# Altium PCB P2_2478.PcbDoc
Units mil, origin at the board's own origin, x right, y up, seen from the top; angles counter-clockwise.
Board outline 6000 x 4000 mil, 2 copper layers (Top Layer, Bottom Layer); 27 components, 35 nets, 115 pads, 4 vias.
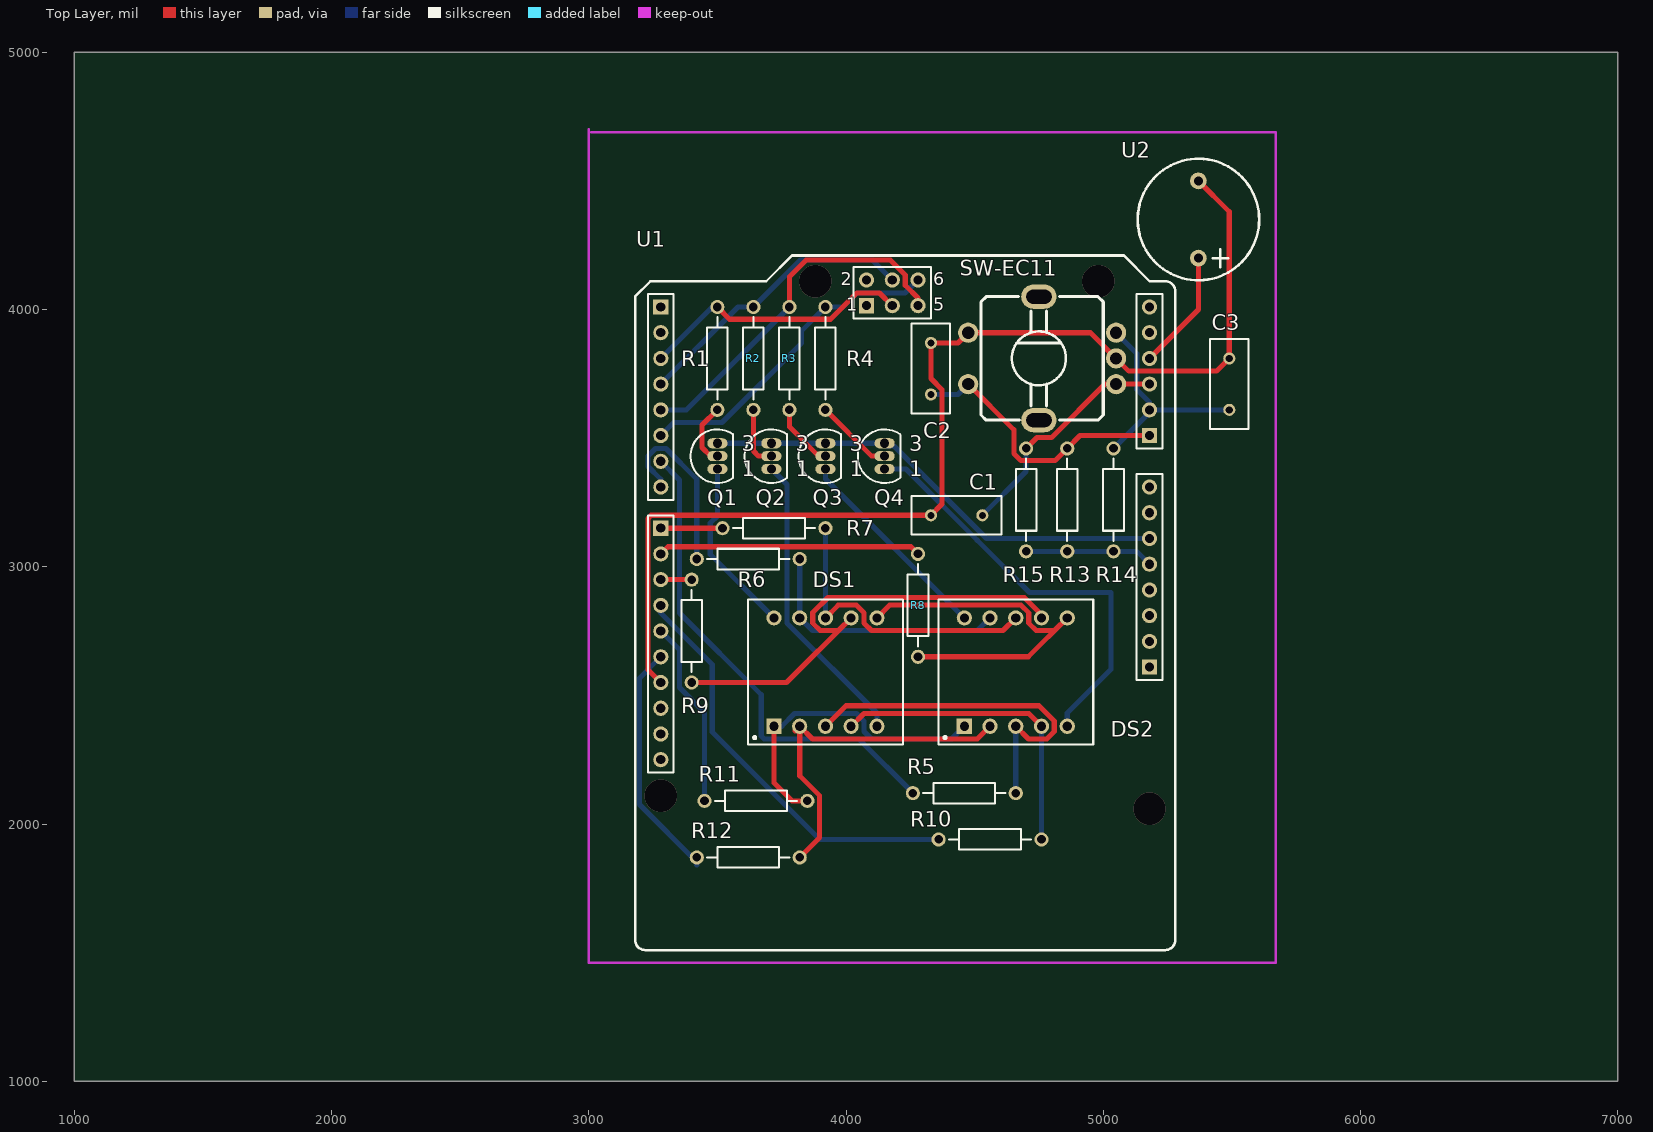
[diagram p0: Top Layer view]
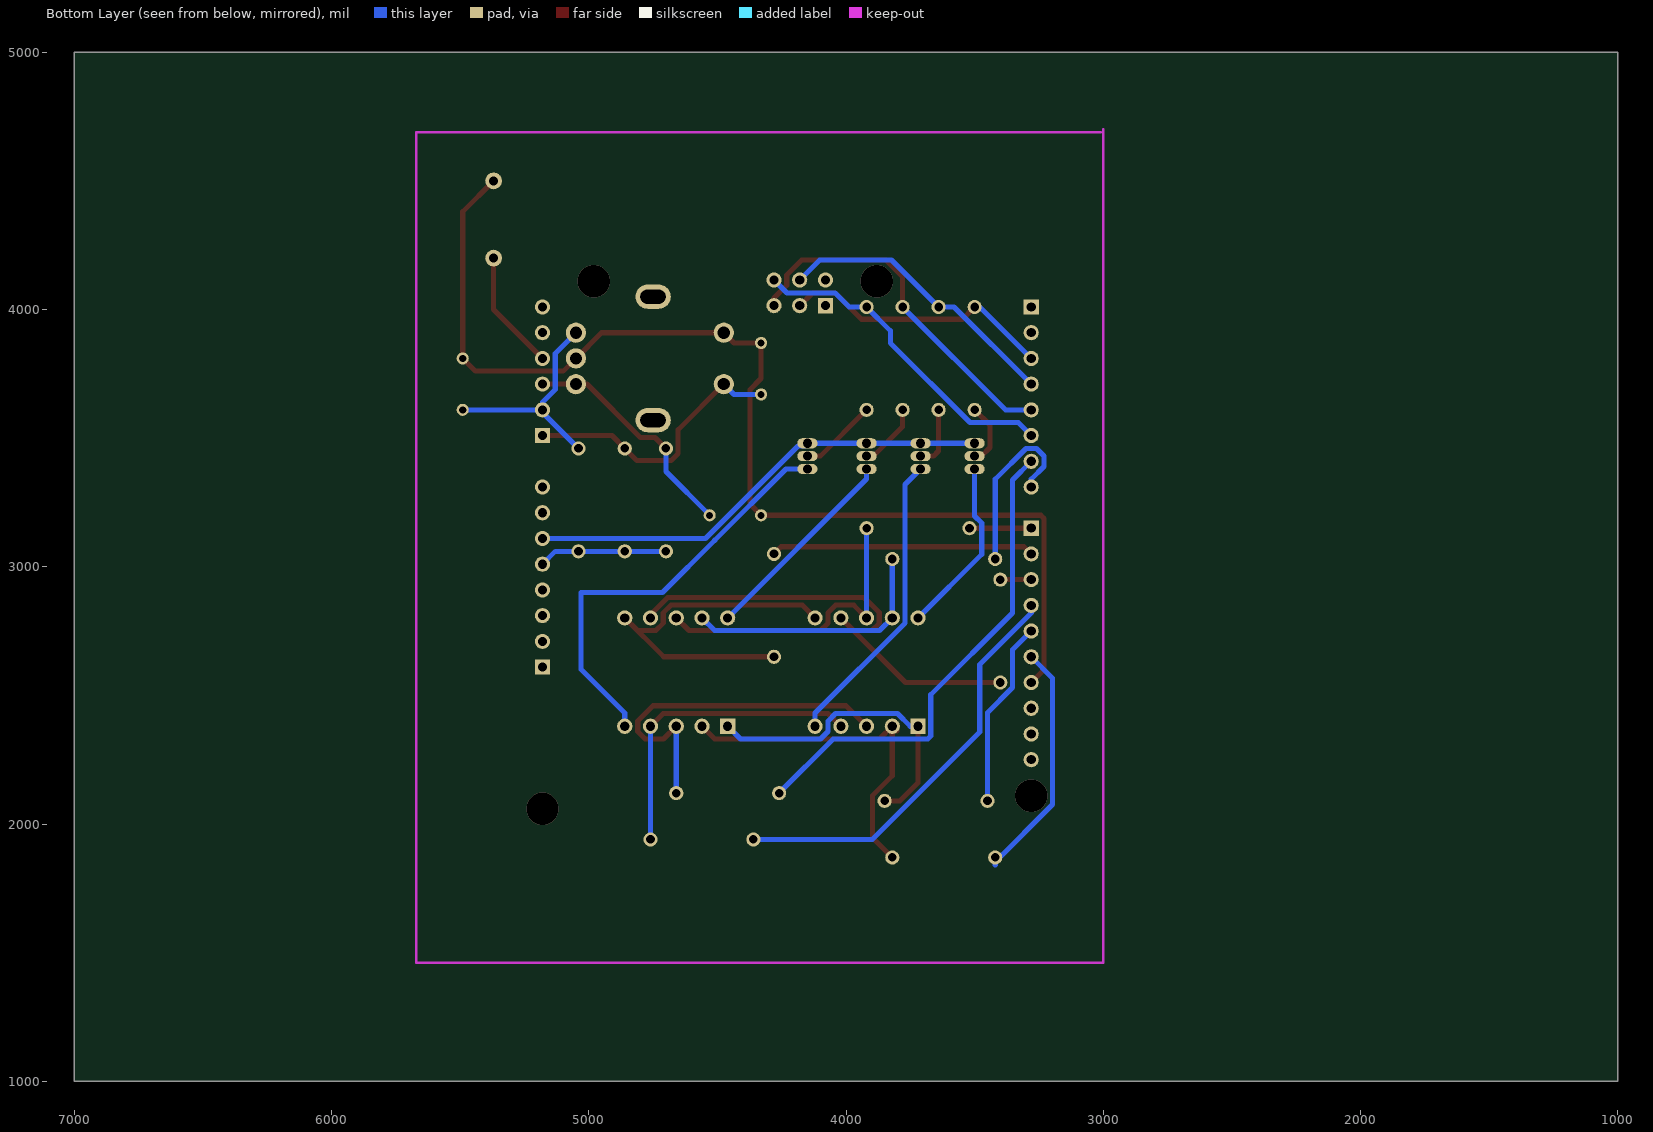
[diagram p1: Bottom Layer view, seen from below]

## Layer stack, top to bottom
Top Layer: signal copper 1.4
Dielectric: dielectric 12.6, FR-4, Dk 4.8
Bottom Layer: signal copper 1.4

## Board outline
1000,1000 7000,1000 7000,5000 1000,5000

## Design rules (kind name [scope] priority, off if disabled: settings)
Clearance [All] p1: gap=10
PolygonConnect [All] p1: connectstyle=Relief reliefconductorwidth=10 reliefentries=4 polygonreliefangle="90 Angle"
RoomDefinition P2_2478 [InComponentClass('P2_2478')] p1: confinementstyle=ConfineIn formatcopy=TRUE lockcomponents=FALSE outline 8000,880 17250,880 17250,3710 8000,3710
RoutingVias [All] p1: holewidth=28 width=50 viastyle="Through Hole" minholewidth=28 minwidth=50 maxholewidth=28 maxwidth=50
SilkscreenOverComponentPads [All] p1: minsilkscreentomaskgap=10
SolderMaskExpansion [All] p1: expansion=4
TestPointUsage [All] p1: valid=0 allowmultiple=FALSE
Testpoint [All] p1: side=15 testpointundercomponent=TRUE minsize=40 maxsize=100 preferedsize=60 minholesize=0 maxholesize=40 preferedholesize=32 testpointgrid=1 style=1023 order=0123456789
Width [All] p1: maxlimit=50 minlimit=10 preferedwidth=10 toplayer_minwidth=20 toplayer_prefwidth=25 bottomlayer_minwidth=20 bottomlayer_prefwidth=25 minimp=50.000000 maximp=50.000000 favimp=50.000000
23 further rules are at their usual default settings.

## Components (designator, comment, footprint, x,y, rotation, side; value= is the part's Value field where it differs from the comment)
C1 "Cap" RAD-0.2 4430,3200 r180 top
C2 "Cap" RAD-0.2 4330,3770 r90 top
C3 "Cap" RAD-0.2 5490,3710 r90 top
DS1 "2-DigitDPY" 2-DigitDPY 3720,2380 r0 top
DS2 "2-DigitDPY" 2-DigitDPY 4460,2380 r0 top
Q1 "NPN" TO-226 3500,3430 r0 top
Q2 "NPN" TO-226 3710,3430 r0 top
Q3 "NPN" TO-226 3920,3430 r0 top
Q4 "NPN" TO-226 4150,3430 r0 top
R1 "Res1" AXIAL-0.4 3500,3810 r270 top
R2 "Res1" AXIAL-0.4 3640,3810 r270 top
R3 "Res1" AXIAL-0.4 3780,3810 r270 top
R4 "Res1" AXIAL-0.4 3920,3810 r270 top
R5 "Res1" AXIAL-0.4 4460,2120 r0 top
R6 "Res1" AXIAL-0.4 3620,3030 r0 top
R7 "Res1" AXIAL-0.4 3720,3150 r0 top
R8 "Res1" AXIAL-0.4 4280,2850 r270 top
R9 "Res1" AXIAL-0.4 3400,2750 r270 top
R10 "Res1" AXIAL-0.4 4560,1940 r0 top
R11 "Res1" AXIAL-0.4 3650,2090 r0 top
R12 "Res1" AXIAL-0.4 3620,1870 r0 top
R13 "Res1" AXIAL-0.4 4860,3260 r270 top
R14 "Res1" AXIAL-0.4 5040,3260 r90 top
R15 "Res1" AXIAL-0.4 4700,3260 r90 top
SW-EC11 "SW-EC11" EC11 4750,3810 r90 top
U1 "Arduino" Arduino-UNO 4230,3150 r90 top
U2 "BUZZER" Buzzer 5370,4200 r90 top

## Footprints (in the part's own frame and the unit in brackets; to place one, negate y for a bottom-side part, rotate by r counter-clockwise, add the part's x,y. Pads: shape width x height; smd on the part's side, far side on the other; paste and mask are expansions set on the pad)
2-DigitDPY [mm] "LED, 7-Segment Display, 9.2 mm, Dual Digit; 10 Leads; Row Space 10.7 mm; Pitch 2.54 mm"
  rect 1.5x1.5 hole 0.9: 1(0,0)
  round 1.5 hole 0.9: 2(2.54,0) 3(5.08,0) 4(7.62,0) 5(10.16,0) 6(10.16,10.7) 7(7.62,10.7) 8(5.08,10.7) 9(2.54,10.7) 10(0,10.7)
  silkscreen extent -2.57,-1.8 12.73,12.5
Arduino-UNO [mm] "Arduino板"
  rect 1.5x1.5 hole 0.9: 1(21.844,24.13) 1(21.971,3.81) 9(0,24.13) 19(-13.716,-24.13) 27(9.144,-24.13)
  round 1.5 hole 0.9: 2(19.304,24.13) 2(24.511,3.81) 3(16.764,24.13) 3(21.971,1.27) 4(14.224,24.13) 4(24.511,1.27) 5(11.684,24.13) 5(21.971,-1.27) 6(9.144,24.13) 6(24.511,-1.27) 7(6.604,24.13) 8(4.064,24.13) 10(-2.54,24.13) 11(-5.08,24.13) 12(-7.62,24.13) 13(-10.16,24.13) 14(-12.7,24.13) 15(-15.24,24.13) 16(-17.78,24.13) 17(-20.32,24.13) 18(-22.86,24.13) 20(-11.176,-24.13) 21(-8.636,-24.13) 22(-6.096,-24.13) 23(-3.556,-24.13) 24(-1.016,-24.13) 25(1.524,-24.13) 26(4.064,-24.13) 28(11.684,-24.13) 29(14.224,-24.13) 30(16.764,-24.13) 31(19.304,-24.13) 32(21.844,-24.13)
  silkscreen extent -41.66,-26.67 26.92,26.67
AXIAL-0.4 [mm] "Resistor; 2 Leads"
  round 1.4 hole 0.85: 1(-5.08,0) 2(5.08,0)
  silkscreen extent -4.06,-1.02 4.06,1.02
Buzzer [mil] "蜂鸣器"
  round 65 hole 36: 1(0,0) 2(300,0)
  silkscreen extent -86,-236 386,236
EC11 [mm] "旋转编码器"
  round 2 hole 1.2: 1(-2.54,-7.62) 2(0,-7.62) 3(2.54,-7.62) 4(2.54,6.985) 5(-2.54,6.985)
  oval 2.4x3.5 hole 1.4 slot 2.5 at 90 deg: 6(-6.096,0) 7(6.096,0)
  silkscreen extent -6.1,-6.35 6.1,5.71
RAD-0.2 [mm] "Jumper Wire; 2 Leads"
  round 1.2 hole 0.7: 1(-2.54,0) 2(2.54,0)
  silkscreen extent -4.44,-1.91 4.44,1.91
TO-226 [mm] "TO, Flat Index; 3 In-Line, Axial Leads; Body Dia. 4.8mm; Leads 0.55 x 0.51 mm (max)"
  oval 2x1 hole 0.9: 1(0,-1.27) 2(0,0) 3(0,1.27)
  silkscreen extent -2.65,-2.65 1.55,2.65

## Part data
C1 C2 C3: "Capacitor"
DS1 DS2: "9.2 mm Green 7-Segment Display: 2-Digit, RH DP"
Q1 Q2 Q3 Q4: "NPN Bipolar Transistor"
R1 R2 R3 R4 R5 R6 R7 R8 R9 R10 R11 R12 R13 R14 R15: "Resistor"
SW-EC11: "旋转编码开关"
U1: library part Arduino-UNO
U2: "Buzzer"

## Via types
v1: diameter 125.98, hole 125.98, Top Layer to Bottom Layer, 4 vias

## Nets (pads, with @x,y where several pads share a name; then routed paths per layer and width w, separated by ;. In a path a pad name is that pad's centre, name@x,y a point inside that pad or via, vN(x,y) a via of type N, cw(c..) or ccw(c..) an arc to the next point about the centre after c; other vN are vias at no path point)
A: DS1.3 DS2.3 R5.2 | length 1430
  Top Layer w20: DS1.3 3999.53,2459.53 4750.52,2459.53 4809.53,2400.51 4809.53,2359.49 4780.52,2330.47 4709.53,2330.47 DS2.3
  Bottom Layer w20: R5.2 DS2.3
B: DS1.9 DS2.9 R6.2 | length 1009.8
  Bottom Layer w20: R6.2 DS1.9 3869.53,2751.73 4510.47,2751.73 DS2.9
C: DS1.8 DS2.8 R7.2 | length 1194.3
  Top Layer w20: DS1.8 3969.53,2850.79 4040.51,2850.79 4070.47,2820.83 4070.47,2780.74 4099.48,2751.73 4610.47,2751.73 DS2.8
  Bottom Layer w20: DS1.8 R7.2
D: DS1.6 DS2.6 R8.2 | length 1488.2
  Top Layer w20: DS1.6 4169.53,2850.79 4680.52,2850.79 4710.47,2820.83 4710.47,2780.74 4739.48,2751.73 4810.47,2751.73 DS2.6 4708.74,2650 R8.2
E: DS1.7 DS2.7 R9.2 | length 1901.4
  Top Layer w20: R9.2 3768.74,2550 DS1.7 3970.47,2751.73 3899.49,2751.73 3870.47,2780.74 3870.47,2821.77 3929.49,2880.79 4692.94,2880.79 4760,2813.73 DS2.7
F: DS1.4 DS2.4 R10.2 | length 1221
  Top Layer w20: DS1.4 4069.53,2429.53 4710.47,2429.53 DS2.4
  Bottom Layer w20: R10.2 DS2.4
G: DS1.1 DS2.1 R11.2 | length 1224.5
  Top Layer w20: DS1.1 3720,2160 3790,2090 R11.2
  Bottom Layer w20: DS1.1 3749.96,2380 3799.49,2429.53 4040.51,2429.53 4070.47,2399.57 4070.47,2359.49 4099.48,2330.47 4410.47,2330.47 DS2.1
GND: C1.2 C2.2 C3.2 SW-EC11.2 SW-EC11.4 U1.15 U2.2 | length 4467.8
  Top Layer w20: U1.15 3230.47,2599.53 3230.47,3187.81 3242.66,3200 C1.2 4373.62,3243.62 4373.62,3688.07 4330,3731.69 C2.2 4435,3870 SW-EC11.4 4950,3910 SW-EC11.2 5099.53,3760.47 5440.47,3760.47 C3.2 5490,4380 U2.2
H: DS1.2 DS2.2 R12.2 | length 1380.1
  Top Layer w20: DS1.2@3802.44,2362.44 DS1.2 ; R12.2 3897.56,1947.56 3897.56,2109.7 3820,2187.26 DS1.2 ; DS2.2 4510.47,2330.47 3869.53,2330.47 DS1.2
NetC1_1: C1.1 R15.2 SW-EC11.1 U1.29 | length 914
  Top Layer w20: R15.2 4742.76,3502.76 4799.51,3502.76 5006.75,3710 SW-EC11.1 U1.29
  Bottom Layer w20: C1.1 4700,3370 R15.2
NetC2_1: C2.1 R13.1 SW-EC11.5 U1.27 | length 1084.3
  Top Layer w20: SW-EC11.5 4652.44,3532.56 4652.44,3440.3 4680.3,3412.44 4812.44,3412.44 R13.1 4910,3510 U1.27
  Bottom Layer w20: C2.1 4435,3670 SW-EC11.5
NetC3_1: C3.1 R14.2 SW-EC11.3 U1.28 | length 871.8
  Bottom Layer w20: R14.2 5180,3600 U1.28 ; SW-EC11.3 5130.47,3829.53 5130.47,3689.49 5180,3639.96 U1.28 ; C3.1 U1.28
NetDS1_5: DS1.5 Q2.1 | length 1169.8
  Bottom Layer w20: Q2.1 3770.47,3319.53 3770.47,2780.74 4120,2431.22 DS1.5
NetDS1_10: DS1.10 Q1.1 | length 692.7
  Bottom Layer w20: Q1.1 3500,3197.26 3472.44,3169.7 3472.44,3048.82 DS1.10
NetDS2_5: DS2.5 Q4.1 | length 1669.2
  Bottom Layer w20: Q4.1 4233.38,3380 4510.47,3102.91 4713.38,2900 5030,2900 5030,2601.22 4860,2431.22 DS2.5
NetDS2_10: DS2.10 Q3.1 | length 802.4
  Bottom Layer w20: Q3.1 3920,3341.26 DS2.10
NetQ1_2: Q1.2 R1.2 | length 244.3
  Top Layer w20: Q1.2 3474.19,3430 3440.63,3463.56 3440.63,3550.63 R1.2
NetQ1_3: Q1.3 Q2.3 Q3.3 Q4.3 U1.24 | length 1833.3
  Bottom Layer w20: Q1.3 Q2.3 Q3.3 Q4.3 4160.31,3469.68 4186.12,3469.68 4545.81,3110 U1.24
NetQ2_2: Q2.2 R2.2 | length 238.3
  Top Layer w20: R2.2 3640,3450 3660,3430 Q2.2
NetQ3_2: Q3.2 R3.2 | length 253.1
  Top Layer w20: R3.2 3780,3544.19 3894.19,3430 Q3.2
NetQ4_2: Q4.2 R4.2 | length 304.6
  Top Layer w20: R4.2 4100,3430 Q4.2
NetR1_1: R1.1 U1.3 | length 1065.3
  Top Layer w20: R1.1 3547.56,3962.44 3940.1,3962.44 4042.19,4064.53 4130.47,4064.53 U1.3@4180,4015
  Bottom Layer w20: U1.3@3280,3810 3480,4010 R1.1
NetR2_1: R2.1 U1.4 | length 1132.4
  Bottom Layer w20: U1.4@3280,3710 3580,4010 R2.1 3822.99,4192.99 4102.01,4192.99 U1.4@4180,4115
NetR3_1: R3.1 U1.5 | length 1425
  Top Layer w20: R3.1 3780,4127.37 3845.62,4192.99 4172.05,4192.99 4230.47,4134.57 4230.47,4094.49 4280,4044.96 U1.5@4280,4015
  Bottom Layer w20: U1.5@3280,3610 3380,3610 R3.1
NetR4_1: R4.1 U1.6 | length 1278.3
  Bottom Layer w20: U1.6@3280,3510 3330.47,3560.47 3517.73,3560.47 3827.56,3870.3 3827.56,3917.56 R4.1 3987.66,4010 4042.19,4064.53 4229.53,4064.53 U1.6@4280,4115
NetR5_1: R5.1 U1.7 | length 1911.1
  Bottom Layer w20: U1.7 3352.44,3337.56 3352.44,2820.47 3670.47,2502.44 3670.47,2342.19 3682.19,2330.47 4049.53,2330.47 R5.1
NetR6_1: R6.1 U1.8 | length 702.1
  Bottom Layer w20: U1.8 3280,3339.96 3230.47,3389.49 3230.47,3430.51 3259.49,3459.53 3300.51,3459.53 3420,3340.04 R6.1
NetR7_1: R7.1 U1.9 | length 240
  Top Layer w20: U1.9 R7.1
NetR8_1: R8.1 U1.10 | length 1022.8
  Top Layer w20: U1.10 3307.56,3077.56 4252.44,3077.56 R8.1
NetR9_1: R9.1 U1.11 | length 120
  Top Layer w20: U1.11 R9.1
NetR10_1: R10.1 U1.12 | length 1628.2
  Bottom Layer w20: U1.12 3280,2820.04 3480,2620.04 3480,2357.56 3897.56,1940 R10.1
NetR11_1: R11.1 U1.13 | length 730.4
  Bottom Layer w20: U1.13 3352.44,2677.56 3352.44,2530.3 3450,2432.74 R11.1
NetR12_1: R12.1 U1.14 | length 936.7
  Bottom Layer w20: U1.14 3197.01,2567.01 3197.01,2075.62 3420,1852.63 3420,1840
NetR13_2: R13.2 R14.1 R15.1 U1.23 | length 500.7
  Bottom Layer w20: R15.1 R13.2 R14.1 5130,3060 U1.23
NetU1_30: U1.30 U2.1 | length 468.7
  Top Layer w20: U1.30 5370,4000 U2.1
pads on no net: SW-EC11.6 SW-EC11.7 U1.1 U1.2 U1.16 U1.17 U1.18 U1.19 U1.20 U1.21 U1.22 U1.25 U1.26 U1.31 U1.32
copper on no net:
  other v1: 5180,2060 3280,2110 3880,4110 4980,4110

## Keep-outs
Keep-Out Layer:
  lines w10: 3000,4700 3000,4680 3000,4660 3000,1460 5670,1460 5670,4690 3030,4690 3010,4690
  text "M67_14_2478_B" at 3840,1620 h60

## Text inside footprints (layer, text, board x,y; h text height)
Q1: Top Overlay "3" at 3595.32,3448.39 h59.05; Top Overlay "1" at 3595.32,3352.09 h59.05
Q2: Top Overlay "3" at 3805.32,3448.39 h59.05; Top Overlay "1" at 3805.32,3352.09 h59.05
Q3: Top Overlay "3" at 4015.32,3448.39 h59.05; Top Overlay "1" at 4015.32,3352.09 h59.05
Q4: Top Overlay "3" at 4245.31,3448.39 h59.05; Top Overlay "1" at 4245.31,3352.09 h59.05
U1: Top Overlay "6" at 4340,4095 h50; Top Overlay "5" at 4340,3995 h50; Top Overlay "2" at 3980,4095 h50; Top Overlay "1" at 4000,3995 h50